# EAGLE board ibm final project (EAGLE 9.7.0)

Size 227.89 x 160.26 mm. Coordinates in mm from the lower left corner, seen from the top.
Outline: 0,0 227.89,0 227.89,160.26 0,160.26 0,0
Copper layers (1*16): Top 0.035mm / dielectric 1.5mm / Bottom 0.035mm
Design rules "default": minimum track width 6mil, minimum drill 0.35mm, track to track 6mil, track to pad 6mil, pad to pad 6mil, via to via 6mil, smd to smd 6mil, copper to edge 40mil, drill to drill 6mil, minimum pad ring 10mil, minimum via ring 8mil, stop-mask expansion 4mil, vias tented up to drill 0mil, thermal gap 10mil

## Footprints (pad centres in the part's own frame; a part is rotated, then mirrored left to right if it is on the bottom)
LEDRD254W60D565H860B = drill 0.981 pad 1.581: 1 -1.27,0; 2 1.27,0
MQ-XX-SOCKET = drill 1.27: 1 -6.223,6.223; 2 -8.788,0; 3 -6.223,-6.223; 4 6.223,-6.223; 5 8.788,0; 6 6.223,6.223
MOTOR = drill 1.118 pad 3.15 octagon: + 2.54,0; - -2.54,0
PIEZO = drill 1 pad 1.6: 1 -3.5,0; 2 3.5,0
RESAD1016W63L850D250B = drill 0.83 pad 1.43: 1 -5.08,0; 2 5.08,0
HA-06-SM065 = drill 1 pad 1.676: 1 -2.54,-2.54; 2 0,2.54; 3 2.54,-2.54
SWITCH-MOMENTARY-PTH-6.5MM = drill 1.016 pad 1.88: 1 -3.251,2.261; 2 3.251,2.261; 3 -3.251,-2.261; 4 3.251,-2.261
ARDUINO-UNO-R3-SHIELD = drill 1.016 pad 1.88: 3.3V 24.13,-2.54; 5V 24.13,0; A0 24.13,12.7; A1 24.13,15.24; A2 24.13,17.78; A3 24.13,20.32; A4 24.13,22.86; A5 24.13,25.4; AREF -24.13,-13.97; D2 -24.13,20.32; D3 -24.13,17.78; D4 -24.13,15.24; D5 -24.13,12.7; D6 -24.13,10.16; D7 -24.13,7.62; D8 -24.13,3.81; D9 -24.13,1.27; D10 -24.13,-1.27; D11 -24.13,-3.81; D12 -24.13,-6.35; D13 -24.13,-8.89; GND@0 24.13,2.54; GND@1 24.13,5.08; GND@2 -24.13,-11.43; IOREF 24.13,-7.62; NC 24.13,-10.16; RES 24.13,-5.08; RX -24.13,25.4; SCL -24.13,-19.05; SDA -24.13,-16.51; TX -24.13,22.86; VIN 24.13,7.62
JHD-162A = drill 1.016 long: 1 -19.05,0; 2 -16.51,0; 3 -13.97,0; 4 -11.43,0; 5 -8.89,0; 6 -6.35,0; 7 -3.81,0; 8 -1.27,0; 9 1.27,0; 10 3.81,0; 11 6.35,0; 12 8.89,0; 13 11.43,0; 14 13.97,0; 15 16.51,0; 16 19.05,0

## Placement (x,y rotation side)
D1  RED  [LEDRD254W60D565H860B]  39.58,78.71 90 top
GAS1  GAS-SENSORMQ-XX-SOCKET  [MQ-XX-SOCKET]  45.93,107.92 180 top
M1  MOTOR_HDR  [MOTOR]  87.79,61.06 270 top
PIEZO1  PIEZO  [PIEZO]  59.9,83.79 270 top
R1  1k  [RESAD1016W63L850D250B]  59.9,118.08 90 top
R2  330  [RESAD1016W63L850D250B]  34.5,62.2 90 top
R3  1k  [RESAD1016W63L850D250B]  181.46,41.58 90 top
RPOT2  250k  [HA-06-SM065]  7.05,76.12 0 top
S2  SWITCH_MOMENTARY  [SWITCH-MOMENTARY-PTH-6.5MM]  45.93,69.82 0 top
U3  ARDUINO-UNO-R3-SHIELD  [ARDUINO-UNO-R3-SHIELD]  193.37,130.42 270 top
UIMM  LCD-16X2JHD-162A  [JHD-162A]  164.95,36.63 0 top

## Library data of the parts
D1 = Tinkercad; CATEGORY: Opto-Electronic; SUB-CATEGORY: LED; VALUE: LED_RED
GAS1 M1 PIEZO1 R1-R3 RPOT2 S2 U3 UIMM = Tinkercad

## Nets
U3_5V: GAS1.4 GAS1.5 GAS1.6 R3.2 RPOT2.1 S2.1 S2.2 U3.5V UIMM.2
U3_A0: GAS1.1 GAS1.3 R1.1 U3.A0
U3_D2: D1.1 U3.D2
U3_D3: R2.2 S2.3 S2.4 U3.D3
U3_D4: PIEZO1.1 U3.D4
U3_D5: M1.+ U3.D5
U3_D6: U3.D6 UIMM.4
U3_D7: U3.D7 UIMM.6
U3_D8: U3.D8 UIMM.11
U3_D9: U3.D9 UIMM.12
U3_D10: U3.D10 UIMM.13
U3_D11: U3.D11 UIMM.14
U3_GND: D1.2 GAS1.2 M1.- PIEZO1.2 R1.2 R2.1 RPOT2.3 U3.GND@0 U3.GND@1 U3.GND@2 UIMM.1 UIMM.5 UIMM.16
UIMM_LED+: R3.1 UIMM.15
UIMM_VO: RPOT2.2 UIMM.3

## Tracks (layer width: path | path; a pad name or v marks a point on that pad's centre or on a via)
U3_5V  (8 unrouted)
U3_A0  (3 unrouted)
U3_D2  (1 unrouted)
U3_D3  (3 unrouted)
U3_D4  (1 unrouted)
U3_D5  (1 unrouted)
U3_D6  (1 unrouted)
U3_D7  (1 unrouted)
U3_D8  (1 unrouted)
U3_D9  (1 unrouted)
U3_D10  (1 unrouted)
U3_D11  (1 unrouted)
U3_GND  (12 unrouted)
UIMM_LED+  (1 unrouted)
UIMM_VO  (1 unrouted)